# Altium PCB PCB.PcbDoc
Units mil, origin at the board's own origin, x right, y up, seen from the top; angles counter-clockwise.
Board outline 3340 x 1275 mil, 2 copper layers (Top Layer, Bottom Layer); 18 components, 11 nets, 42 pads, 0 vias.
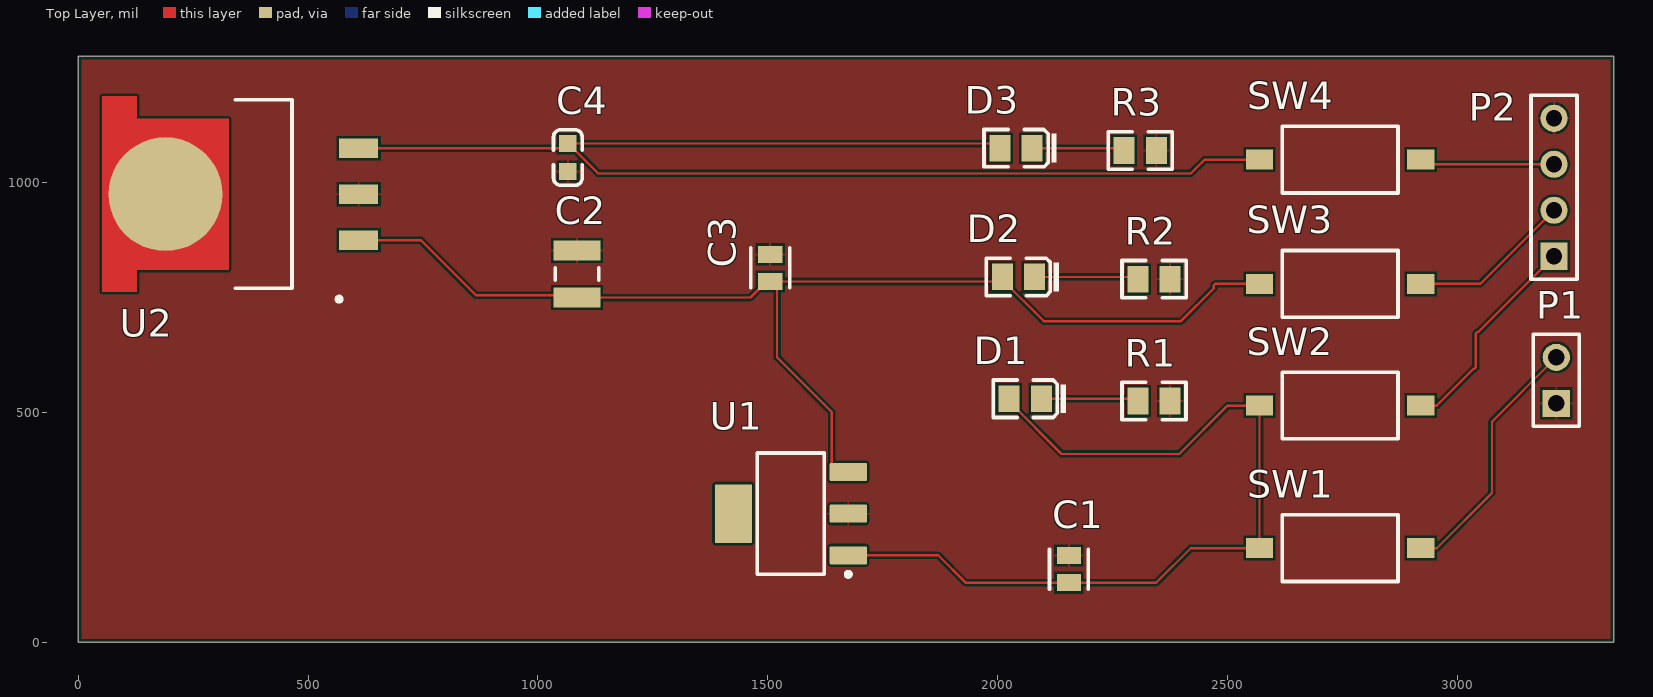
[diagram p0: Top Layer view]
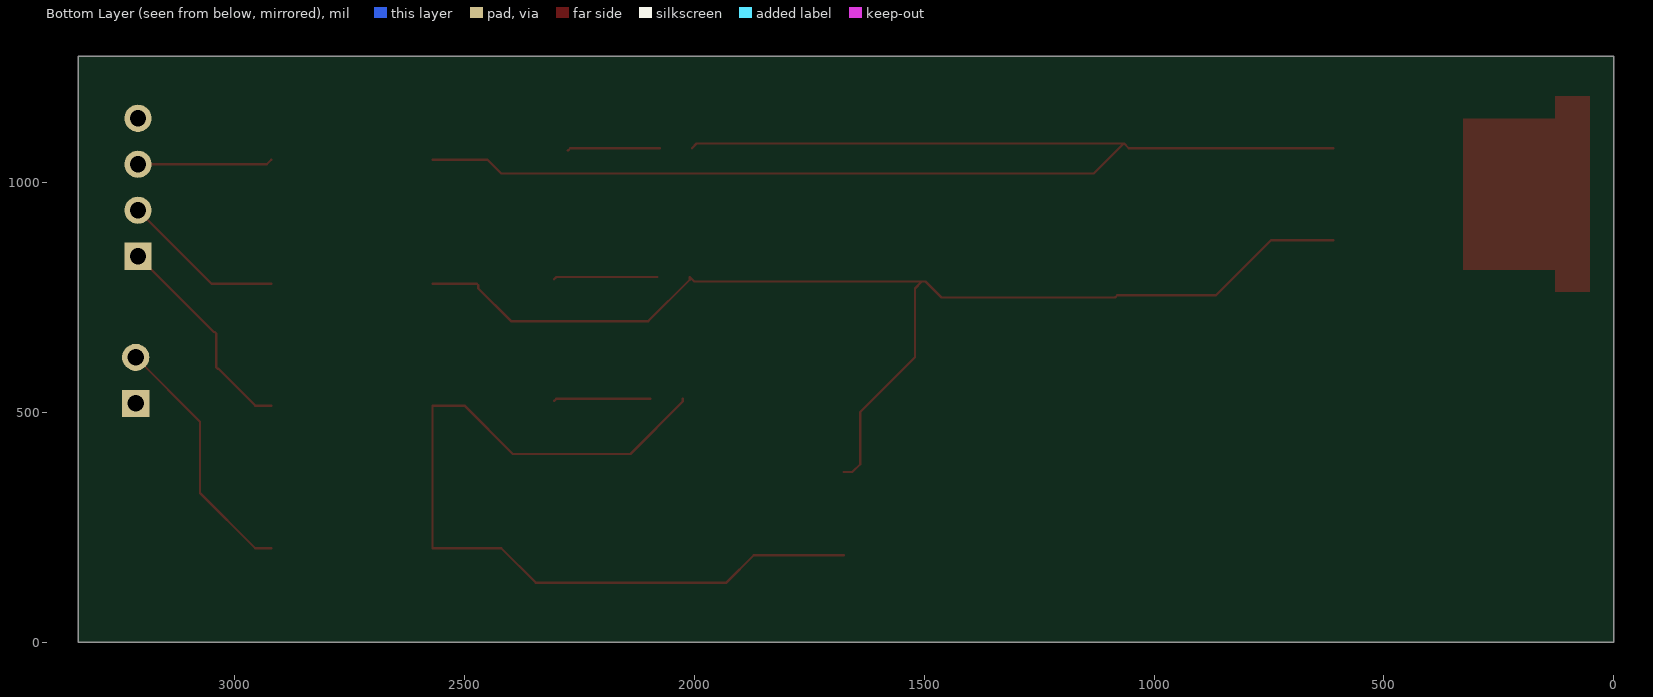
[diagram p1: Bottom Layer view, seen from below]
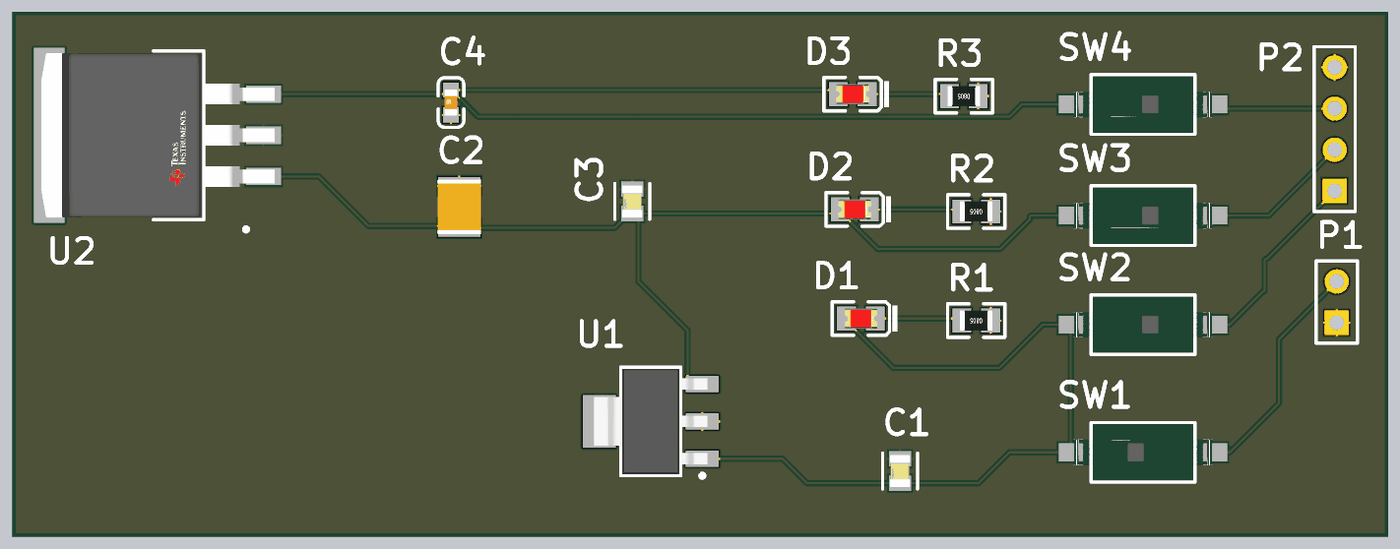
[diagram p2: 3D render of the assembled board from above, using the file's embedded part models]

## Layer stack, top to bottom
Top Solder: solder mask 0.4, Solder Resist, Dk 3.5
Top Layer: signal copper 1.4
Dielectric 1: dielectric 12.6, FR-4, Dk 4.8
Bottom Layer: signal copper 1.4
Bottom Solder: solder mask 0.4, Solder Resist, Dk 3.5

## Board outline
0,0 3340,0 3340,1275 0,1275

## Design rules (kind name [scope] priority, off if disabled: settings)
BoardOutlineClearance [All] p1: gap=7.87 ignorepadtopadclearanceinfootprint=FALSE
Clearance [All] p1: gap=5 ignorepadtopadclearanceinfootprint=FALSE except(9.84: Arc-Hole Track-Hole SMDPad-Hole THPad-Hole Via-Hole Fill-Hole Poly-Hole Region-Hole Text-Hole)
ComponentClearance [All] p1: gap=5 collisioncheckmode=3 verticalgap=5 showdistances=TRUE
DiffPairsRouting [All] p1: maxlimit=10 minlimit=5 mostfreqgap=5 toplayer_minwidth=5 toplayer_maxwidth=1000 toplayer_prefwidth=5 bottomlayer_minwidth=5 bottomlayer_maxwidth=1000 bottomlayer_prefwidth=5 maxuncoupledlength=500
Height [All] p1: minheight=0 maxheight=71497.94 prefheight=500
HoleSize [All] p1: absolutevalues=TRUE maxlimit=248.03 minlimit=11.81 maxpercent=80.000 minpercent=20.000
HoleToHoleClearance [All] p1: gap=9.84 allowstackedmicrovias=FALSE
MinimumAnnularRing [All] p1: minimumring=3
MinimumSolderMaskSliver [All] p1: minsoldermaskwidth=0
PlaneClearance [All] p1: clearance=5
PlaneConnect PlaneConnectPowerPads [InPadClass('PowerPads')] p1: planeconnectstyle=Direct reliefexpansion=20 reliefentries=4 reliefconductorwidth=10 reliefairgap=10
PlaneConnect [All] p2: pad.planeconnectstyle=Relief pad.reliefexpansion=11.81 pad.reliefentries=4 pad.reliefconductorwidth=5 pad.reliefairgap=5 via.planeconnectstyle=Direct via.reliefexpansion=11.81 via.reliefentries=4 via.reliefconductorwidth=5 via.reliefairgap=5
PolygonConnect PolygonConnectPowerPads [All vs (InPadClass('PowerPads'))] p1: connectstyle=Direct reliefconductorwidth=10 reliefentries=4 polygonreliefangle="90 Angle" airgapwidth=10
PolygonConnect [All] p2: thpad.connectstyle=Relief thpad.reliefconductorwidth=5 thpad.reliefentries=4 thpad.polygonreliefangle="90 Angle" thpad.airgapwidth=5 smdpad.connectstyle=Relief smdpad.reliefconductorwidth=5 smdpad.reliefentries=4 smdpad.polygonreliefangle="90 Angle" smdpad.airgapwidth=5 via.connectstyle=Direct via.reliefconductorwidth=5 via.reliefentries=4 via.polygonreliefangle="90 Angle" via.airgapwidth=5
RoutingVias [All] p1: holewidth=11.81 width=23.62 viastyle="Through Hole" minholewidth=11.81 minwidth=23.62 maxholewidth=23.62 maxwidth=259.84
SilkToSilkClearance [All] p1: silktosilkclearance=0
SilkToSolderMaskClearance [IsPad] p1: minsilkscreentomaskgap=5 clearancetoexposedcopper=TRUE
SolderMaskExpansion [All] p1: expansion=2.95 istentingtop=FALSE
Width [All] p1: maxlimit=1000 minlimit=5 preferedwidth=5 minimp=50.000000 maximp=50.000000 favimp=50.000000
20 further rules are at their usual default settings.

## Components (designator, comment, footprint, x,y, rotation, side; value= is the part's Value field where it differs from the comment)
C1 "C0805C474K4RACTU" FP-C0805C-DN-MFG 2155,159.53 r90 top value="0.47 μF"
C2 "1210YD226KAT2A" CAPC3225X279X50LL20T25 1085,801.18 r270 top
C3 "C0805C474K4RACTU" FP-C0805C-DN-MFG 1505,814.53 r90 top value="0.47 μF"
C4 "330nF" 0603_C 1065,1054.68 r90 top
D1 "0805 Red" 0805_LED_S1 2060,530 r180 top
D2 "0805 Red" 0805_LED_S1 2044.96,795 r180 top
D3 "0805 Red" 0805_LED_S1 2039.96,1075 r180 top
P1 "Header 2" HDR1X2 3215,520 r90 top
P2 "Header 4" HDR1X4 3210,840 r90 top
R1 "1KΩ ±1%" 0805_R 2339.96,525 r180 top
R2 "1KΩ ±1%" 0805_R 2340,790 r180 top
R3 "1KΩ ±1%" 0805_R 2309.96,1070 r180 top
SW1 "A6S-1104-H" FP-A6S-1104-H-MFG 2744.8,205 r90 top
SW2 "A6S-1104-H" FP-A6S-1104-H-MFG 2744.8,515 r270 top
SW3 "A6S-1104-H" FP-A6S-1104-H-MFG 2744.8,780 r270 top
SW4 "A6S-1104-H" FP-A6S-1104-H-MFG 2744.8,1050 r270 top
U1 "LM2940IMP-5.0/NOPB" DCY0004A_M 1550,280 r180 top
U2 "LM3940ISX-3.3/NOPB" FP-KTT0003B-MFG 352.32,975 r90 top

## Footprints (in the part's own frame and the unit in brackets; to place one, negate y for a bottom-side part, rotate by r counter-clockwise, add the part's x,y. Pads: shape width x height; smd on the part's side, far side on the other; paste and mask are expansions set on the pad)
0603_C [mm]
  rect 0.93x0.98 smd: 1(-0.77,0) 2(0.77,0)
  silkscreen extent -1.53,-0.79 1.54,0.79, body extent -0.8,-0.4 0.8,0.4, height 0.3
0805_LED_S1 [mm]
  rect 1.16x1.47 smd: A(0.89,0) K(-0.89,0)
  silkscreen extent -2.25,-1.04 1.77,1.03, body extent -1.01,-0.62 1.01,0.62, height 1.1
0805_R [mm]
  rect 1.16x1.47 smd: 1(-0.89,0) 2(0.89,0)
  silkscreen extent -1.77,-1.04 1.77,1.03, body extent -1,-0.62 1,0.63, height 0.49
CAPC3225X279X50LL20T25 [mm] "Chip Capacitor, 2-Leads, Body 3.40x2.70mm, IPC High Density"
  rect 1.1x2.6 smd: 1(-1.3,0) 2(1.3,0)
  silkscreen extent -0.35,-1.2 0.35,1.2, body extent -1.7,-1.35 1.7,1.35, height 2.79
DCY0004A_M [mm] "SOT223, 4-Leads, Body 6.7x3.7mm, Pitch 2.3mm, IPC Low Density"
  rrect10% 2.05x1 smd: 1(-3.175,2.3) 2(-3.175,0) 3(-3.175,-2.3)
  rrect5% 2.05x3.25 smd: 4(3.175,0)
  silkscreen extent -3.3,-3.35 1.85,3.47, body extent -3.5,-3.25 3.5,3.25, height 1.62
FP-A6S-1104-H-MFG [mm]
  rect 1.1x1.5 smd paste+0 mask+0: 1(0,-4.45) 2(0,4.45)
  silkscreen extent -1.84,-3.2 1.84,3.2, body extent -1.94,-5.3 1.94,5.3, height 0.25
FP-C0805C-DN-MFG [mm]
  rect 0.95x1.35 smd paste+0 mask+0: 1(-0.75,0) 2(0.75,0)
  silkscreen extent -1.1,-1.07 1.1,1.07, body extent -1.4,-0.85 1.4,0.85, height 0.25
FP-KTT0003B-MFG [mm]
  rect 1.07x2.16 smd paste+0 mask+0: 1(-2.54,-6.545) 2(0,-6.545) 3(2.54,-6.545)
  round 6.291 smd paste+0 mask+0: 4(0,4.13)
  Top Layer region: 5.4,7.625 -5.4,7.625 -5.4,5.715 -4.165,5.715 -4.165,0.635 4.165,0.635 4.165,5.715 5.4,5.715 5.4,7.625
  silkscreen extent -5.93,-5.59 5.21,0.26, body extent -5.5,-7.73 5.5,7.73, height 0.25
HDR1X2 [mm] "Connector; Header; 2 Position"
  rect 1.5x1.5 hole 0.9: 1(0,0)
  round 1.5 hole 0.9: 2(2.54,0)
  silkscreen extent -1.27,-1.27 3.81,1.27
HDR1X4 [mm] "Connector; Header; 4 Position"
  rect 1.5x1.5 hole 0.9: 1(0,0)
  round 1.5 hole 0.9: 2(2.54,0) 3(5.08,0) 4(7.62,0)
  silkscreen extent -1.27,-1.27 8.89,1.27

## Part data
C1 C3: library part CMP-2007-03296-2, "CAP CER 0.47UF 16V 10% X7R 0805", Capacitance="0.47 μF", Manufacturer=KEMET, Package=C0805C-DN, Temperature="-55°C to +125°C", Temperature Characteristic=X7R, Temperature Coefficient=30ppm/°C, Temperature Range High=+125°C, Temperature Range Low=-55°C, Tolerance=0.1, Voltage Rating="16 V", Automotive=No, Category=Cap, ComponentLink2Description=Datasheet, ComponentLink2URL=https://content.kemet.com/datasheets/KEM_C1003_C0G_SMD.pdf, Device Class L1="Passive Components", Device Class L2=Capacitors, Device Class L3="Ceramic Capacitors", Digikey Description="CAP CER 0.47UF 16V 10% X7R 0805", Height=0.88mm, Ipc Land Pattern Name=CAPC200125X78, Lead Free=Yes, Manufacturer Part Number=C0805C474K4RACTU, Material=Ceramic, Mouser Description="Multilayer Ceramic Capacitor, C Series, 0.47 - F, - 10%, X7r, 16 V, 0805 [2012 Metric] Rohs Compliant: Yes", Octopart=https://octopart.com/c0805c474k4ractu-kemet-107561, RoHS=TRUE
C2: library part CMP-2000-05483-1, "Chip Capacitor, 22 uF, +/- 10%, 16 V, -55 to 85 degC, 1210 (3225 Metric), RoHS, Tape and Reel", Capacitance=22µF, Case Size/Dimension=1210, Dielectric=X5R, Manufacturer=AVX, Package Description="2-Pin Surface Mount Device, Body 3.2 x 2.5 mm", Rated Voltage=16V, Tolerance (%)=±10%, Datasheet URL=http://datasheets.avx.com/cx5r.pdf, Datasheet Version=05/2016, Manufacturer URL=http://www.avx.com/, Mounting Technology=SurfaceMount, Package Reference=1210
C4: library part "0603 330nF (334) 10% 25V", "Chip capacitors", Manufacturer="Guangdong Fenghua Advanced Tech", Package=0603, PartNumber=0603B334K250NT, SuppliersPartNumber=C1615, Tolerance=10%, Voltage=25V, Capacitance=330nF, ComponentLink1Description="Supplier link", ComponentLink1URL=http://www.szlcsc.com/product/details_1967.html, Supplier=LC
D1 D2 D3: library part "0805 LED Red", "LED", Color=Red, Manufacturer="Foshan NationStar Optoelectronics", Package=0805, PartNumber=FC-2012HRK-620D, SuppliersPartNumber=C84256, ComponentLink1Description=供应商链接, ComponentLink1URL=http://www.szlcsc.com/product/details_2668.html, Supplier=LC
P1: "Header, 2-Pin", LatestRevisionDate=17-Jul-2002, LatestRevisionNote="Re-released for DXP Platform.", Publisher="Altium Limited"
P2: "Header, 4-Pin", LatestRevisionDate=17-Jul-2002, LatestRevisionNote="Re-released for DXP Platform.", Publisher="Altium Limited"
R1 R2 R3: library part "0805 1K (1001) 1%", "Chip resistor", Manufacturer="Uniroyal Elec", Package=0805, PartNumber=0805W8F1001T5E, Power=1/8W, Resistance=1KΩ, SuppliersPartNumber=C17513, Tolerance=1%, ComponentLink1Description="Supplier link", ComponentLink1URL=http://www.szlcsc.com/product/details_18201.html, Supplier=LC
SW1 SW2 SW3 SW4: library part CMP-08827-000005-1, "SWITCH SLIDE DIP SPST 25MA 24V", Ambient Temperature Range High=+70°C, Ambient Temperature Range Low=-20°C, Contact Current Rating=25mA, Contact Resistance=200mΩ, Manufacturer="Omron Electronics Inc-EMC Div", Package=0, Temperature="-20°C to +70°C", Voltage Rating Dc=24V, Automotive=No, Category=Switch, ComponentLink2Description=Datasheet, ComponentLink2URL=https://omronfs.omron.com/en_US/ecb/products/pdf/en-a6s.pdf, Device Class L1=Electromechanical, Device Class L2=Switches, Device Class L3="DIP Switches", Digikey Description="SWITCH SLIDE DIP SPST 25MA 24V", Electromechanical Life=1000Cycles, Height=3.95mm, Lead Free=Yes, Manufacturer Part Number=A6S-1104-H, Mount="Surface Mount", Mouser Description="DIP Switches / SIP Switches Dip Switch", Number Of Circuits=1, Octopart=https://octopart.com/a6s-1104-h-omron-55410938, RoHS=TRUE, Standoff Height=0mm, Temperature Range High=+70°C, Temperature Range Low=-20°C, Throw Configuration=SPST-NO
U1: library part CMP-0062-01724-3, "1A Low Dropout Regulator, 4-pin SOT-223, Pb-Free", Manufacturer="Texas Instruments", PackageTopMarking=XYTT*L53B, PowerWise=N, Code_IPC=SOT223-4, Code_JEDEC=TO-261-AA, ComponentLink1Description="Datasheet URL", ComponentLink1URL=http://www.ti.com/general/docs/lit/getliterature.tsp?genericPartNumber=LM2940-N&fileType=pdf, CompType="LDO IC", PackageDescription="Molded SOT-223, 6.50 x 3.56 x 1.6mm Body, 4 Lead, 2.3mm Pitch", PackageReference=DCY0004A, PinCount=4, RoHS=Y
U2: library part CMP-04917-000003-1, "IC REG LIN 3.3V 1A DDPAK/TO263-3", Dropout Voltage=0.5V, Manufacturer="Texas Instruments", Max Junction Temp=+125°C, Max Supply Voltage=5.5V, Min Supply Voltage=4.5V, Nominal Supply Current=10-110mA, Output Current=1A, Output Voltage=3.3V, Package=KTT0003B, Temperature="-40°C to +125°C", Temperature Range Low=-40°C, Accuracy Percentage=2.5%, Automotive=No, Category=IC, ComponentLink2Description=Datasheet, ComponentLink2URL=http://www.ti.com/lit/ds/symlink/lm3940.pdf, Device Class L1="Integrated Circuits (ICs)", Device Class L2="Power Management ICs", Device Class L3="Voltage Regulators - Linear", Digikey Description="IC REG LIN 3.3V 1A DDPAK/TO263-3", Height=4.79mm, Lead Free=Yes, Manufacturer Part Number=LM3940ISX-3.3/NOPB, Mouser Description="LDO Voltage Regulators 1A LDO REG", Number Of Outputs=1, Octopart=https://octopart.com/lm3940isx-3.3%2Fnopb-texas+instruments-24814218, Output Type=Fixed, RoHS=TRUE, Standoff Height=0mm, Temperature Range High=+125°C

## Nets (pads, with @x,y where several pads share a name; then routed paths per layer and width w, separated by ;. In a path a pad name is that pad's centre, name@x,y a point inside that pad or via, vN(x,y) a via of type N, cw(c..) or ccw(c..) an arc to the next point about the centre after c; other vN are vias at no path point)
+3.3V: C4.2 D3.A SW4.1 U2.3 | length 2946.2
  Top Layer w5: U2.3 1055,1075 C4.2 C4.2@1065.98,1085 ; D3.A 1994.92,1085 C4.2@1065.98,1085 ; SW4.1 2450,1050 2420,1020 1130.98,1020 C4.2@1065.98,1085
+5V: C2.2 C3.1 D2.A SW3.1 U1.3 U2.1 | length 2607
  Top Layer w5: U2.1 745,875 865,755 1080,755 C2.2 1462.13,750 1497.13,785 C3.1 ; U1.3 1656.3,370.55 1639.11,387.74 1639.11,500.89 1520,620 1520,770 C3.1 ; SW3.1 2472.93,780 2470,777.07 2470,770 2398.82,698.82 2100,698.82 2009.92,788.9 D2.A 1999.92,785 C3.1
+12V: C1.1 D1.A SW1.2 SW2.1 U1.1 | length 1901.7
  Top Layer w5: U1.1 1870.55,189.45 1930,130 C1.1 2345,130 2420,205 SW1.2 SW2.1 2500,515 2395,410 2138.86,410 2024.96,523.9 D1.A
GND: C1.2 C2.1 C3.2 C4.1 P1.1 P2.4 R1.1 R2.1 R3.1 U1.2 U2.2
NetD1_K: D1.K R1.2 | length 212
  Top Layer w5: D1.K 2299.92,530 R1.2
NetD2_K: D2.K R2.2 | length 227
  Top Layer w5: D2.K 2299.96,795 R2.2
NetD3_K: D3.K R3.2 | length 202
  Top Layer w5: D3.K 2269.92,1075 R3.2
NetP1_2: P1.2 SW1.1 | length 557.7
  Top Layer w5: SW1.1 2955,205 3075,325 3075,480 P1.2
NetP2_1: P2.1 SW2.2 | length 468.1
  Top Layer w5: SW2.2 2955,515 3035,595 3037.07,595 3040,597.93 3040,672.07 3042.93,675 3045,675 P2.1
NetP2_2: P2.2 SW3.2 | length 356.3
  Top Layer w5: SW3.2 3050,780 P2.2
NetP2_3: P2.3 SW4.2 | length 294.1
  Top Layer w5: SW4.2 2930,1040 P2.3
pads on no net: U1.4 U2.4

## Polygon pours and split planes (outlines as drawn)
GND on Top Layer "GND_L01_P000" (solid, pour order 0): -5,1280 3345,1280 3345,5 3335,-5 0,-5